# EAGLE board U-Value (EAGLE 7.6.0)
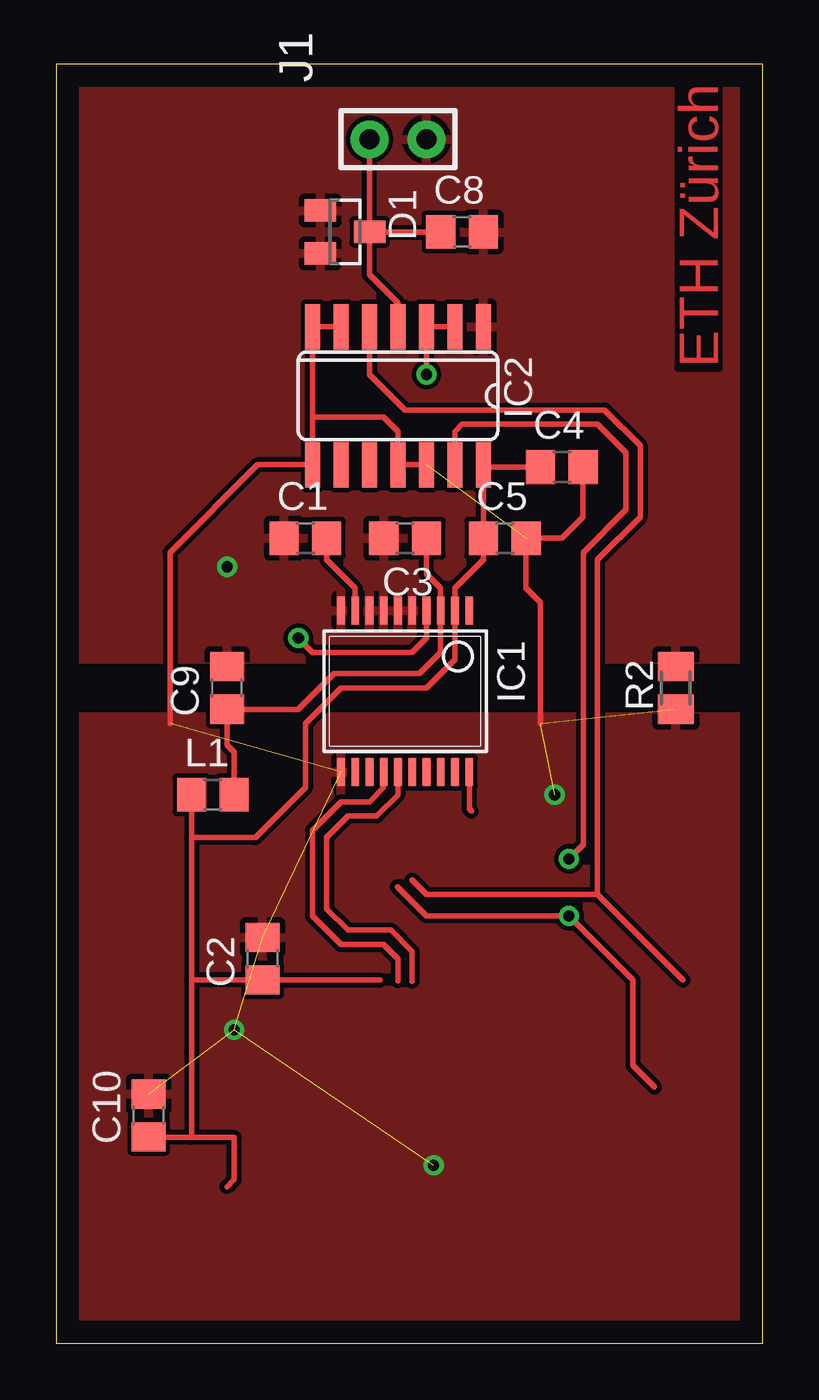
[diagram p0: board, top side]
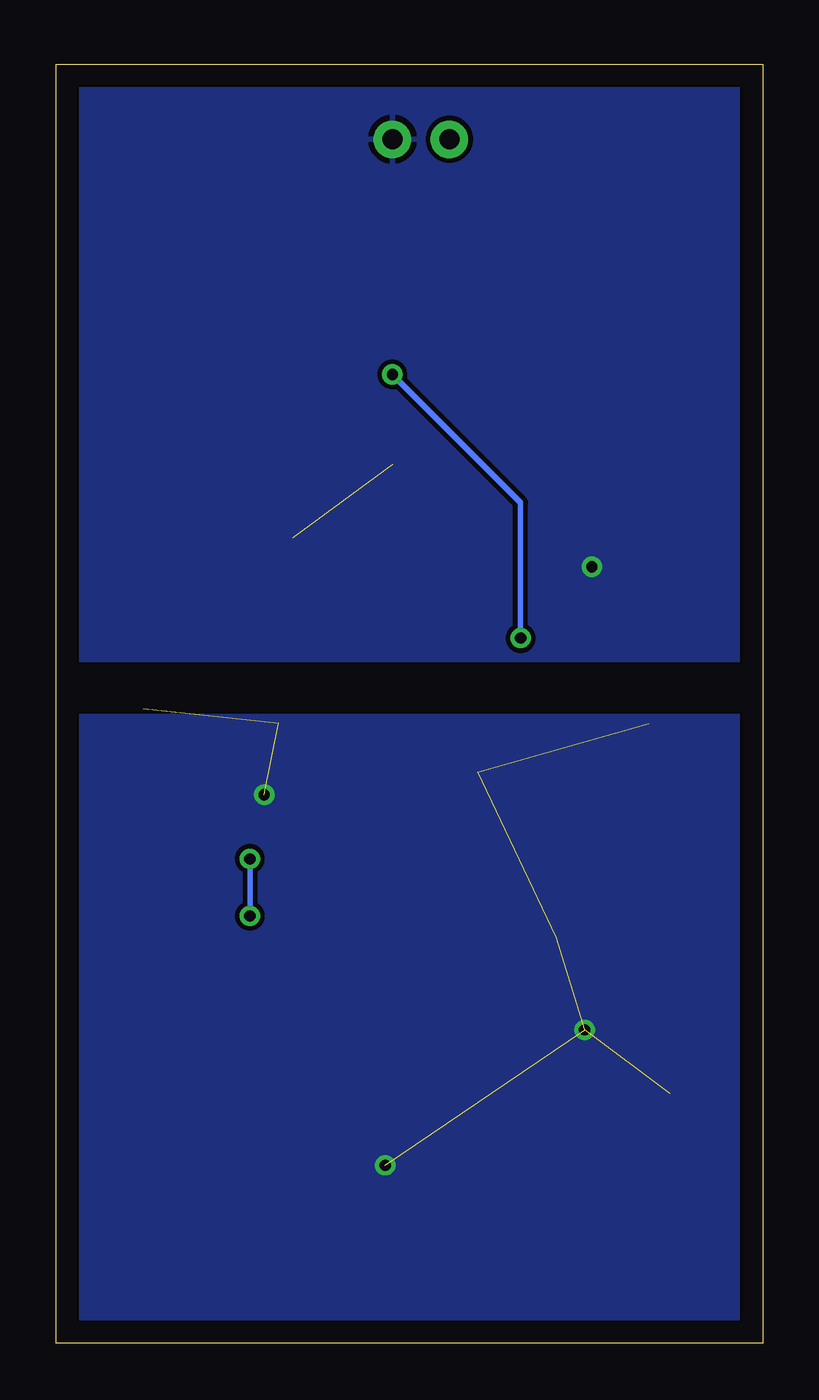
[diagram p1: board, bottom side, seen from below]

Size 31.5 x 57 mm. Coordinates in mm from the lower left corner, seen from the top.
Outline: 0,0 31.5,0 31.5,57 0,57 0,0
Copper layers (1*16): Top 0.035mm / dielectric 1.5mm / Bottom 0.035mm
Design rules "default *": minimum track width 10mil, minimum drill 24mil, track to track 8mil, track to pad 8mil, pad to pad 8mil, via to via 8mil, smd to smd 8mil, copper to edge 40mil, drill to drill 8mil, minimum pad ring 10mil, minimum via ring 8mil, stop-mask expansion 4mil, vias tented up to drill 0mil, thermal gap 10mil

## Footprints (pad centres in the part's own frame; a part is rotated, then mirrored left to right if it is on the bottom)
C0805 = smd 1.3 x 1.5: 1 -0.95,0; 2 0.95,0
0805 = smd 0.8 x 1.2: 1 -0.9,0; 2 0.9,0
SOT23 = smd 1 x 1.4: 1 -0.95,-1.1; 2 0.95,-1.1; 3 0,1.1
LED-0603 = smd 1 x 1: A -0.877,0; C 0.877,0
SSOP20 = smd 0.35 x 1.245: 1 -2.857,-3.45; 2 -2.222,-3.45; 3 -1.587,-3.45; 4 -0.952,-3.45; 5 -0.317,-3.45; 6 0.318,-3.45; 7 0.953,-3.45; 8 1.588,-3.45; 9 2.223,-3.45; 10 2.858,-3.45; 11 2.858,3.75; 12 2.223,3.75; 13 1.588,3.75; 14 0.953,3.75; 15 0.318,3.75; 16 -0.317,3.75; 17 -0.952,3.75; 18 -1.587,3.75; 19 -2.222,3.75; 20 -2.857,3.75
SO14 = smd 0.66 x 2.032: 1 -3.81,-3.073; 2 -2.54,-3.073; 3 -1.27,-3.073; 4 0,-3.073; 5 1.27,-3.073; 6 2.54,-3.073; 7 3.81,-3.073; 8 3.81,3.073; 9 2.54,3.073; 10 1.27,3.073; 11 0,3.073; 12 -1.27,3.073; 13 -2.54,3.073; 14 -3.81,3.073
CON2X1 = drill 0.9 pad 1.676: 1 0,0; 2 0,2.54
M-2X3 = smd 1 x 3: P$1 0,0; P$2 2.54,0; P$3 4.98,0; P$4 4.98,5.05; P$5 2.54,5.05; P$6 0,5.05
0805' = smd 1.3 x 1.5: 1 -0.95,0; 2 0.95,0
M0805 = smd 1.3 x 1.6: 1 -0.95,0; 2 0.95,0
JS202011SCQN = smd 1.27 x 2.4: 1 -2.5,-2.7; 2 0,-2.7; 3 2.5,-2.7; 4 -2.5,2.7; 5 0,2.7; 6 2.5,2.7
M-PUSHBUTTON-SMD = smd 1.55 x 1.3: 1 0,0; 2 7.95,0; 3 0,-4.2; 4 7.95,-4.2
TQFP32-08 = smd 1.27 x 0.559: 1 -4.293,2.8; 2 -4.293,2; 3 -4.293,1.2; 4 -4.293,0.4; 5 -4.293,-0.4; 6 -4.293,-1.2; 7 -4.293,-2; 8 -4.293,-2.8; 17 4.293,-2.8; 18 4.293,-2; 19 4.293,-1.2; 20 4.293,-0.4; 21 4.293,0.4; 22 4.293,1.2; 23 4.293,2; 24 4.293,2.8 | smd 0.559 x 1.27: 9 -2.8,-4.293; 10 -2,-4.293; 11 -1.2,-4.293; 12 -0.4,-4.293; 13 0.4,-4.293; 14 1.2,-4.293; 15 2,-4.293; 16 2.8,-4.293; 25 2.8,4.293; 26 2,4.293; 27 1.2,4.293; 28 0.4,4.293; 29 -0.4,4.293; 30 -1.2,4.293; 31 -2,4.293; 32 -2.8,4.293
RESONATOR-SMD = smd 0.45 x 1.905: 1 -1.2,0; 2 0,0; 3 1.2,0

## Placement (x,y rotation side)
C1  100n  [C0805]  11.11,35.88 0 top
C2  100n  [C0805]  9.21,17.14 90 top
C3  100n  [C0805]  15.56,35.88 180 top
C4  100n  [C0805]  22.54,39.05 0 top
C5  100n  [C0805]  20,35.88 0 top
C6  [0805]  -24.13,-14.92 0 top  (outside the outline)
C8  1u  [C0805]  18.1,49.53 0 top
C9  100n  [C0805]  7.62,29.21 90 top
C10  1u  [C0805]  4.13,10.16 90 top
C12  [0805]  -35.88,-20.64 0 top  (outside the outline)
D1  BAV99  [SOT23]  12.88,49.53 270 top
D2  [LED-0603]  -38.1,-28.57 0 top  (outside the outline)
IC1  MCP3911A0-E/SS  [SSOP20]  15.56,29.21 180 top
IC2  4066D  [SO14]  15.24,42.23 180 top
J1  [CON2X1]  16.51,53.66 90 top
J2  ARDUINO_ISP  [M-2X3]  -18.73,-0.95 0 top  (outside the outline)
L1  74279220601  [0805']  6.99,24.45 0 top
R1  330  [0805]  -38.73,-20.64 0 top  (outside the outline)
R2  0  [M0805]  27.62,29.21 90 top
R3  [0805]  -21.27,-14.92 0 top  (outside the outline)
R4  100k  [0805]  -26.99,-14.92 0 top  (outside the outline)
S2  SLIDE_SWITCH_JS202011SCQN  [JS202011SCQN]  -13.02,-13.02 0 top  (outside the outline)
S3  PUSHBUTTON  [M-PUSHBUTTON-SMD]  -27.3,-17.78 0 top  (outside the outline)
U2  ATMEGA328P_TQFP  [TQFP32-08]  -7.94,4.13 0 top  (outside the outline)
Y1  8MHZ  [RESONATOR-SMD]  -38.1,-24.77 0 top  (outside the outline)

## Library data of the parts
C1-C5 C8-C10 IC1 = heatflow
C6 C12 D2 J2 R1 R3 R4 S2 S3 = wsn
D1 = LEDXLamp
IC2 = 40xx
J1 = Stecker_Pins
L1 = heatflow2
R2 = resistor
U2 = wsn; PROD_ID: IC-09069
Y1 = wsn; PROD_ID: XTAL-08895

## Nets
AD_CS: IC1.17
AD_RESET: IC1.1
ADCLK: IC1.15
AGND: C1.1 C3.2 C8.2 C9.2 D1.1 D1.2 IC1.5 IC1.6 IC1.7 IC1.8 IC1.10 IC2.1 J1.1 R2.2
AVDD: C3.1 C9.1 IC1.3 L1.2
D10_SS: U2.14
D11_MOSI: U2.15
D12_MISO: J2.P$1 J2.P$3 U2.16
D13_SCK: J2.P$2 U2.17
DATA_READY: IC1.14
DEBUG: R3.1
DGND: C2.2 C4.2 C5.2 C10.2 IC1.11 IC2.6 IC2.7 IC2.8 IC2.11 IC2.12 R2.1
DVDD: C2.1 C4.1 C5.1 C10.1 IC1.2 IC2.14 L1.1
GND: C6.2 C12.2 D2.C J2.P$5 S2.3 S3.1 S3.2 U2.3 U2.5 U2.21 Y1.2
INPUT_EN: IC2.5
LED: R1.2 U2.13
MISO: IC1.19
MOSI: IC1.20
N$1: S2.6
N$2: C1.2 IC1.9
N$3: C6.1 U2.20
N$4: S2.5
N$5: U2.24
N$6: U2.25
N$7: U2.26
N$8: IC1.4 IC2.2 IC2.3
N$9: U2.27
N$10: U2.28
N$11: U2.19
N$12: C8.1 D1.3 IC2.4 J1.2
N$13: U2.22
N$14: U2.30
N$15: U2.31
N$16: U2.32
N$17: U2.1
N$18: U2.2
N$19: U2.9
N$20: U2.10
N$21: U2.11
N$22: U2.12
N$23: U2.8 Y1.3
N$24: D2.A R1.1
N$25: U2.7 Y1.1
N$26: S2.4
N$28: U2.23
N$31: R3.2 S2.2
RESET: J2.P$4 R4.1 S3.3 S3.4 U2.29
SCK: IC1.18
SHORT: IC2.13
VCC: C12.1 J2.P$6 R4.2 S2.1 U2.4 U2.6 U2.18

## Tracks (layer width: path | path; a pad name or v marks a point on that pad's centre or on a via)
AD_CS
  Top 0.254: 16.51,25.61 IC1.17
ADCLK
  Top 0.254: IC1.15 15.24,24.45 14.29,23.5 13.02,23.5 12.06,22.54 12.06,19.37 13.02,18.41 14.92,18.41 15.88,17.46 15.88,16.14
AGND  (via drill 0.5)
  other vias: 7.62,34.61
  pour Top: -2.54,30.48 -2.54,59.69 34.29,59.69 34.29,30.48
  pour Bottom: -1.27,30.48 33.02,30.48 33.02,58.42 -1.27,58.42
AVDD
  Top 0.254: C3.1 16.51,34.29 17.14,33.66 IC1.3 17.14,32.51 17.14,30.8 16.19,29.84 12.38,29.84 10.79,28.26 C9.1 7.62,26.67 7.94,26.35 L1.2
D12_MISO  (2 unrouted)
D13_SCK  (1 unrouted)
DATA_READY
  Top 0.254: IC1.14 14.6,24.77 13.97,24.13 12.7,24.13 11.43,22.86 11.43,19.05 12.7,17.78 14.61,17.78 15.24,17.14 15.24,16.16
DGND  (via drill 0.5)  (8 unrouted)
  Top 0.254: IC2.6 IC2.7 11.43,41.27 | 11.43,41.27 IC2.8 8.99,39.15 5.08,35.24 5.08,27.62 | IC2.12 IC2.11 15.24,40.64 14.61,41.27 11.43,41.27 | C4.2 23.49,36.83 22.54,35.88 C5.2 20.95,33.66 21.59,33.02 21.59,27.62
  other vias: 16.83,7.94 7.94,13.97 22.23,24.45
  pour Top: -2.54,-2.54 -2.54,27.94 34.29,27.94 34.29,-2.54
  pour Bottom: -2.54,-2.54 -2.54,27.94 34.29,27.94 34.29,-2.54
DVDD
  Top 0.254: 7.62,6.99 7.94,7.3 7.94,9.18 6.03,9.18 | 6.03,9.18 4.16,9.18 C10.1 | 6.03,9.18 6.03,13.02 6.04,13.02 6.04,16.19 | 14.44,16.2 C2.1 6.04,16.2 6.04,16.19 | L1.1 6.04,22.54 | 6.04,22.54 6.04,16.19 | C4.1 20.64,39.05 20.32,39.05 19.15,39.05 IC2.14 C5.1 19.05,34.92 17.78,33.65 IC1.2 17.78,30.48 16.51,29.21 12.7,29.21 11.11,27.62 11.11,24.77 8.89,22.54 6.04,22.54
GND  (10 unrouted)
INPUT_EN
  Top 0.254: 15.86,20.65 16.51,20 24.13,20 | 24.13,20 27.94,16.19 | IC2.5 13.97,43.18 15.56,41.59 24.45,41.59 26.04,40.01 26.04,36.83 24.13,34.92 24.13,20
LED  (1 unrouted)
MISO
  Top 0.254: 17.81,25.58 IC1.19
MOSI
  Top 0.254: 18.51,23.72 18.41,23.81 18.41,25.61 IC1.20
N$2
  Top 0.254: IC1.9 13.34,33.66 12.06,34.92 C1.2
N$3  (1 unrouted)
N$8  (via drill 0.5)
  Top 0.254: IC2.2 IC2.3 v16.51,43.18 | IC1.4 16.51,31.43 15.88,30.8 11.43,30.8 v10.79,31.43
  Bottom 0.254: v10.79,31.43 10.79,37.47 v16.51,43.18
N$12
  Top 0.254: IC2.4 15.24,46.35 13.97,47.62 13.97,48.89 D1.3 | D1.3 C8.1 | D1.3 13.98,53.33 J1.2
N$23  (1 unrouted)
N$24  (1 unrouted)
N$25  (1 unrouted)
N$31  (1 unrouted)
RESET  (4 unrouted)
SCK
  Top 0.254: 17.16,25.59 IC1.18
SHORT  (via drill 0.5)
  Top 0.254: 15.21,20.35 16.51,19.05 v22.86,19.05 25.72,16.19 25.72,12.38 26.67,11.43 | IC2.13 17.78,40.64 18.1,40.96 24.13,40.96 25.4,39.69 25.4,37.15 23.5,35.24 23.5,22.23 v22.86,21.59
  Bottom 0.254: v22.86,21.59 v22.86,19.05
VCC  (6 unrouted)

## Text on the board
Top: ETH Zürich